# EAGLE board CTS_Teensy_Board_v1_1 (EAGLE 9.3.0)
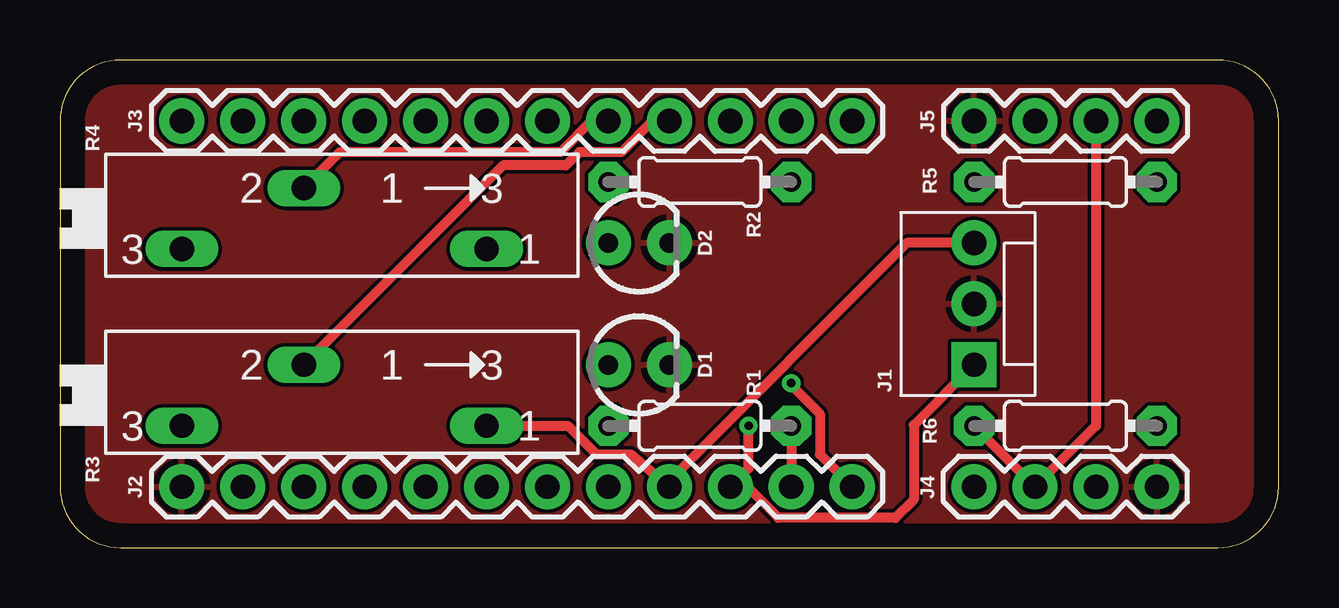
[diagram p0: board, top side]
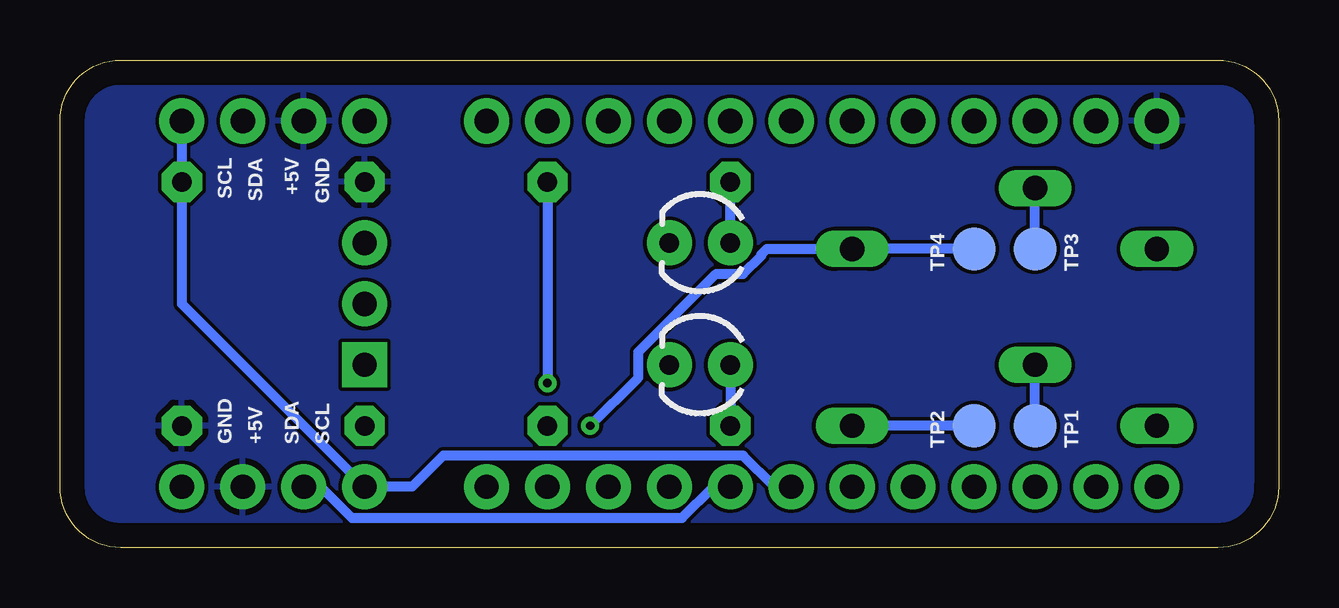
[diagram p1: board, bottom side, seen from below]

Size 50.8 x 20.32 mm. Coordinates in mm from the lower left corner, seen from the top.
Outline: 2.54,0 48.26,0 arc90 50.8,2.54 50.8,17.78 arc90 48.26,20.32 2.54,20.32 arc90 0,17.78 0,2.54 arc90 2.54,0
Copper layers (1*16): Top 0.035mm / dielectric 1.5mm / Bottom 0.035mm
Design rules "default": minimum track width 6mil, minimum drill 0.35mm, track to track 6mil, track to pad 6mil, pad to pad 6mil, via to via 6mil, smd to smd 6mil, copper to edge 40mil, drill to drill 6mil, minimum pad ring 10mil, minimum via ring 8mil, stop-mask expansion 4mil, vias tented up to drill 0mil, thermal gap 10mil

## Footprints (pad centres in the part's own frame; a part is rotated, then mirrored left to right if it is on the bottom)
LED_3MM = drill 0.813 pad 1.88: A -1.27,0; K 1.27,0
MOLEX-1X3 = drill 1.016 pad 1.88 square: 1 0,0 | drill 1.016 pad 1.88: 2 2.54,0; 3 5.08,0
1X12 = drill 1.016 pad 1.88: 1 0,0; 2 2.54,0; 3 5.08,0; 4 7.62,0; 5 10.16,0; 6 12.7,0; 7 15.24,0; 8 17.78,0; 9 20.32,0; 10 22.86,0; 11 25.4,0; 12 27.94,0
1X04 = drill 1.016 pad 1.88: 1 0,0; 2 2.54,0; 3 5.08,0; 4 7.62,0
0204/7 = drill 0.813 pad 1.676 octagon: 1 -3.81,0; 2 3.81,0
SP19L = drill 1.016 long: A 5.715,-1.27; E -6.985,-1.27; S -1.905,1.27
TP18R = smd 1.8 x 1.8: TP 0,0

## Placement (x,y rotation side)
D1  [LED_3MM]  24.13,7.62 0 top
D2  [LED_3MM]  24.13,12.7 0 top
J1  [MOLEX-1X3]  38.1,7.62 90 top
J2  [1X12]  5.08,2.54 0 top
J3  [1X12]  5.08,17.78 0 top
J4  [1X04]  45.72,2.54 180 top
J5  [1X04]  38.1,17.78 0 top
R1  [0204/7]  26.67,5.08 0 top
R2  [0204/7]  26.67,15.24 0 top
R3  [SP19L]  12.06,6.35 0 top
R4  [SP19L]  12.06,13.72 0 top
R5  [0204/7]  41.91,15.24 180 top
R6  [0204/7]  41.91,5.08 0 top
TP1  TPTP18R  [TP18R]  10.16,5.08 0 bottom
TP2  TPTP18R  [TP18R]  12.7,5.08 0 bottom
TP3  TPTP18R  [TP18R]  10.16,12.45 270 bottom
TP4  TPTP18R  [TP18R]  12.7,12.45 0 bottom

## Library data of the parts
D1 D2 = SparkFun-LED; PROD_ID: DIO-08794
J1 = SparkFun-Connectors; PROD_ID: CONN-08625; SF_ID: PRT-08096
J2 J3 = SparkFun-Connectors
J4 J5 = SparkFun-Connectors; PROD_ID: CONN-09696
R1 R2 R5 R6 = adafruit
R3 R4 = pot
TP1-TP4 = testpad

## Nets
GND: D1.K D2.K J1.2 J2.1 J4.1 J5.1
N$31: D2.A R2.1
N$32: D1.A R1.1
PB0(SS): J2.2
PB1(SCLK): J2.3
PB2(MOSI): J2.4
PB3(MISO): J2.5
PB4(ADC11): J3.10
PB5(ADC12/OC1A/~OC4B): J3.9 R3.S TP1.TP
PB6(ADC13/OC1B/OC4B): J3.8 R4.S TP3.TP
PB7(RTS/OC1C/OC0A): J2.6
PC6(~OC4A/OC3A): J2.11 R1.2
PC7(OC4A/ICP3): J2.12 R2.2
PD0(OC0B/SCL/INT0): J2.7 J4.4 J5.4 R5.1
PD1(SDA/INT1): J2.8 J4.3 J5.3 R6.1
PD2(RXD1/INT2): J1.3 J2.9 R3.A TP2.TP
PD3(TXD1/INT3): J1.1 J2.10 R4.A TP4.TP
PD6(ADC9/T1/~OC4D): J3.12
PD7(ADC10/T0/OC4D): J3.11
PF0(ADC0): J3.2
PF1(ADC1): J3.3
PF4(ADC4): J3.4
PF5(ADC5): J3.5
PF6(ADC6): J3.6
PF7(ADC7): J3.7
VCC: J3.1 J4.2 J5.2 R5.2 R6.2

## Tracks (layer width: path | path; a pad name or v marks a point on that pad's centre or on a via)
GND
  pour Top: -2.54,20.32 -2.54,1.27 1.27,-2.54 49.53,-2.54 52.07,0 52.07,20.32 49.53,22.86 0,22.86
N$31
  Bottom 0.406: D2.A R2.1
N$32
  Bottom 0.406: D1.A R1.1
PB5(ADC12/OC1A/~OC4B)
  Top 0.406: R3.S 18.47,15.93 21.09,15.93 21.65,16.48 23.4,16.48 24.69,17.78 J3.9
  Bottom 0.406: TP1.TP R3.S
PB6(ADC13/OC1B/OC4B)
  Top 0.406: J3.8 22.15,17.78 20.86,16.48 11.66,16.48 R4.S
  Bottom 0.406: TP3.TP R4.S
PC6(~OC4A/OC3A)
  Top 0.406: R1.2 J2.11
PC7(OC4A/ICP3)  (via drill 0.35)
  Top 0.406: v30.48,6.86 30.48,6.77 31.67,5.57 31.67,3.89 J2.12
  Bottom 0.406: R2.2 v30.48,6.86
PD0(OC0B/SCL/INT0)
  Bottom 0.406: J5.4 R5.1 45.72,10.16 J4.4 36.12,2.54 34.83,3.83 22.32,3.83 21.03,2.54 J2.7
PD1(SDA/INT1)
  Top 0.406: J5.3 43.18,5.08 J4.3 R6.1
  Bottom 0.406: J4.3 39.93,2.54 38.64,1.25 24.86,1.25 23.57,2.54 J2.8
PD2(RXD1/INT2)
  Top 0.406: J1.3 35.31,12.7 25.4,2.79 J2.9 23.8,3.89 22.37,3.89 21.17,5.08 R3.A
  Bottom 0.406: TP2.TP R3.A
PD3(TXD1/INT3)  (via drill 0.35)
  Top 0.406: J1.1 35.59,5.11 35.59,2 34.83,1.25 29.94,1.25 28.65,2.54 J2.10 28.7,3.3 v28.7,5.08
  Bottom 0.406: v28.7,5.08 26.7,7.09 26.7,8.16 23.45,11.4 22.32,11.4 21.57,12.16 21.57,12.22 21.34,12.45 R4.A TP4.TP
VCC
  pour Bottom: 49.53,22.86 1.27,22.86 -2.54,19.05 -2.54,0 0,-2.54 49.53,-2.54 52.07,0 52.07,20.32

## Text on the board
bNames: GND | +5V | SDA | SCL | SCL | SDA | +5V | GND